# Altium PCB PCB1.PcbDoc
Units mm, origin at the board's own origin, x right, y up, seen from the top; angles counter-clockwise.
Board outline 120 x 120 mm, 2 copper layers (Top Layer, Bottom Layer); 55 components, 39 nets, 182 pads, 0 vias.
Unrouted connection lines stored in the file: 111.
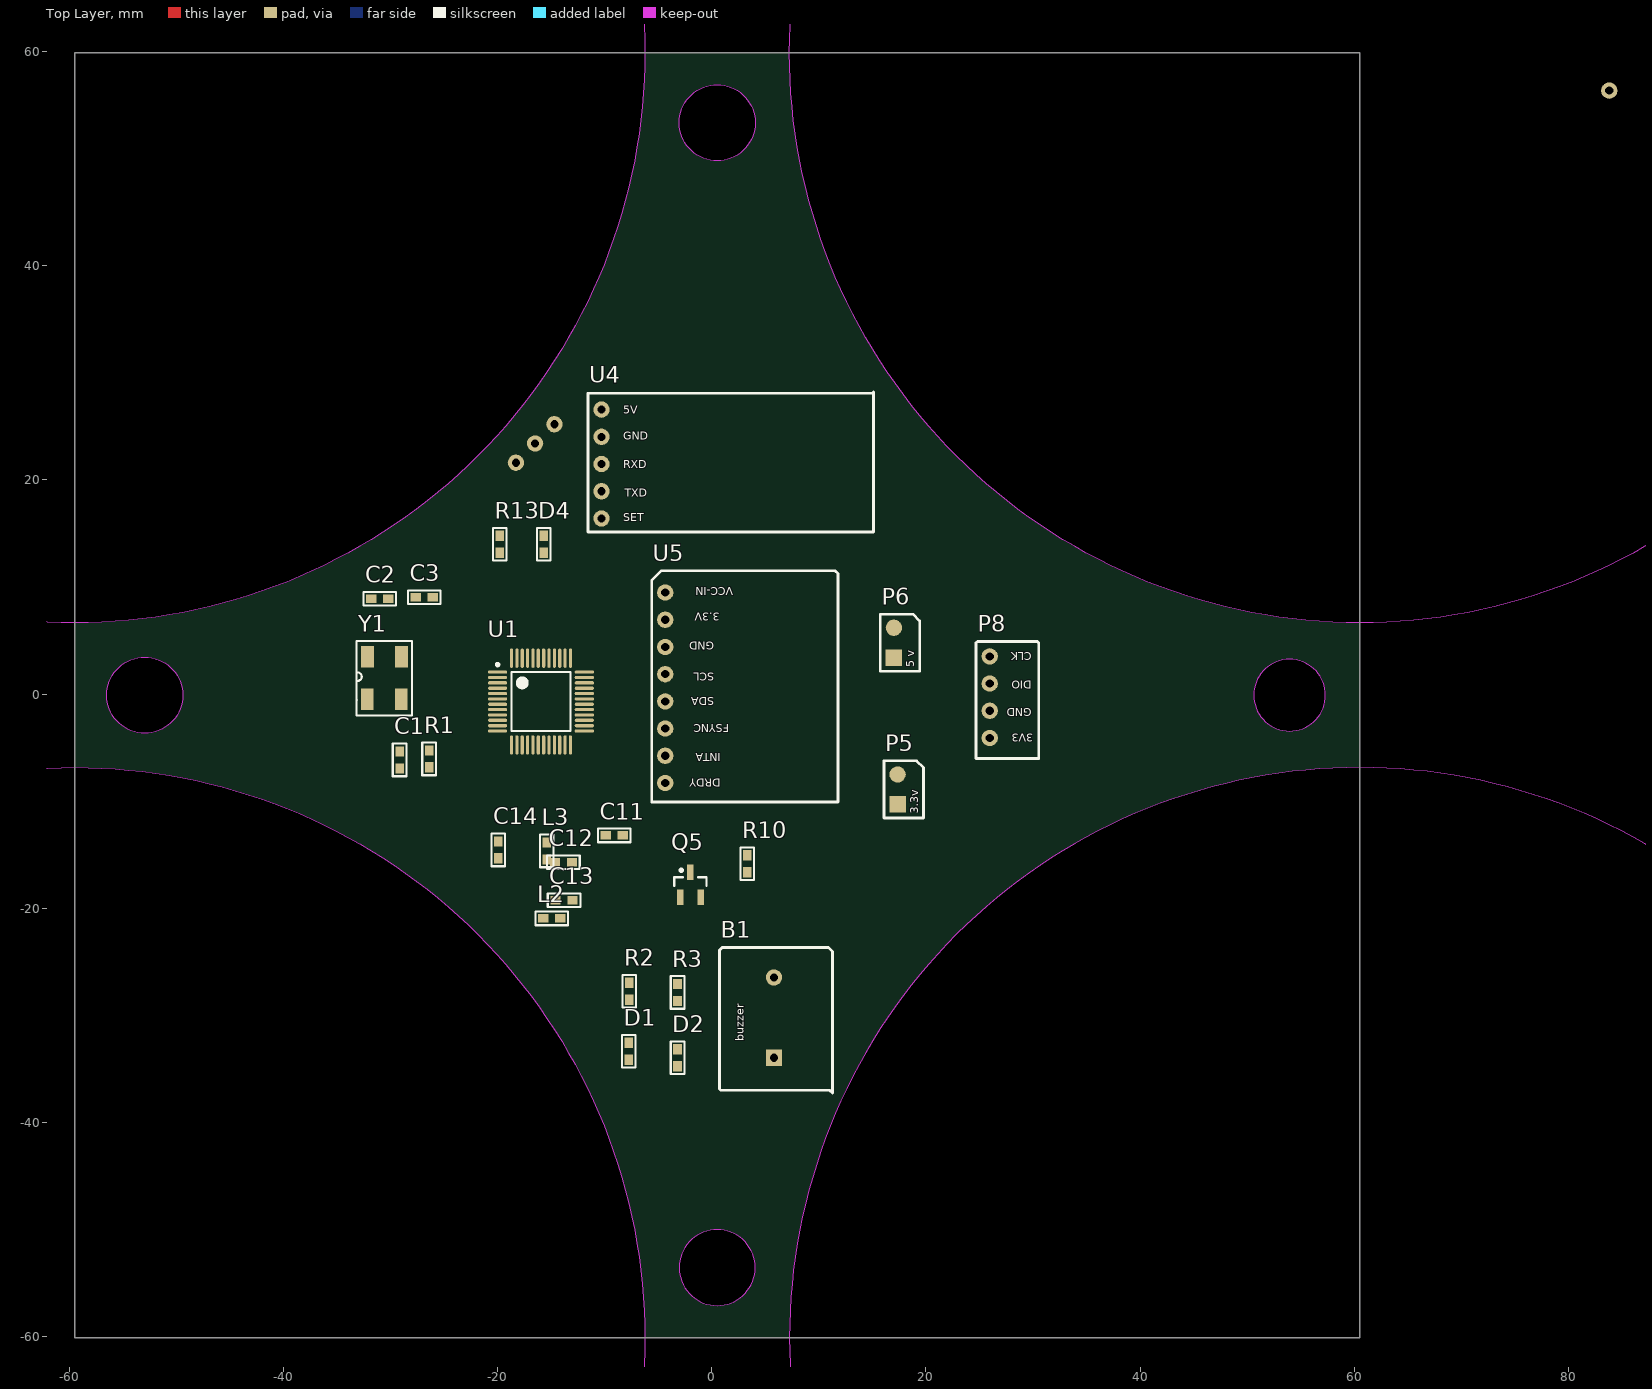
[diagram p0: Top Layer view]
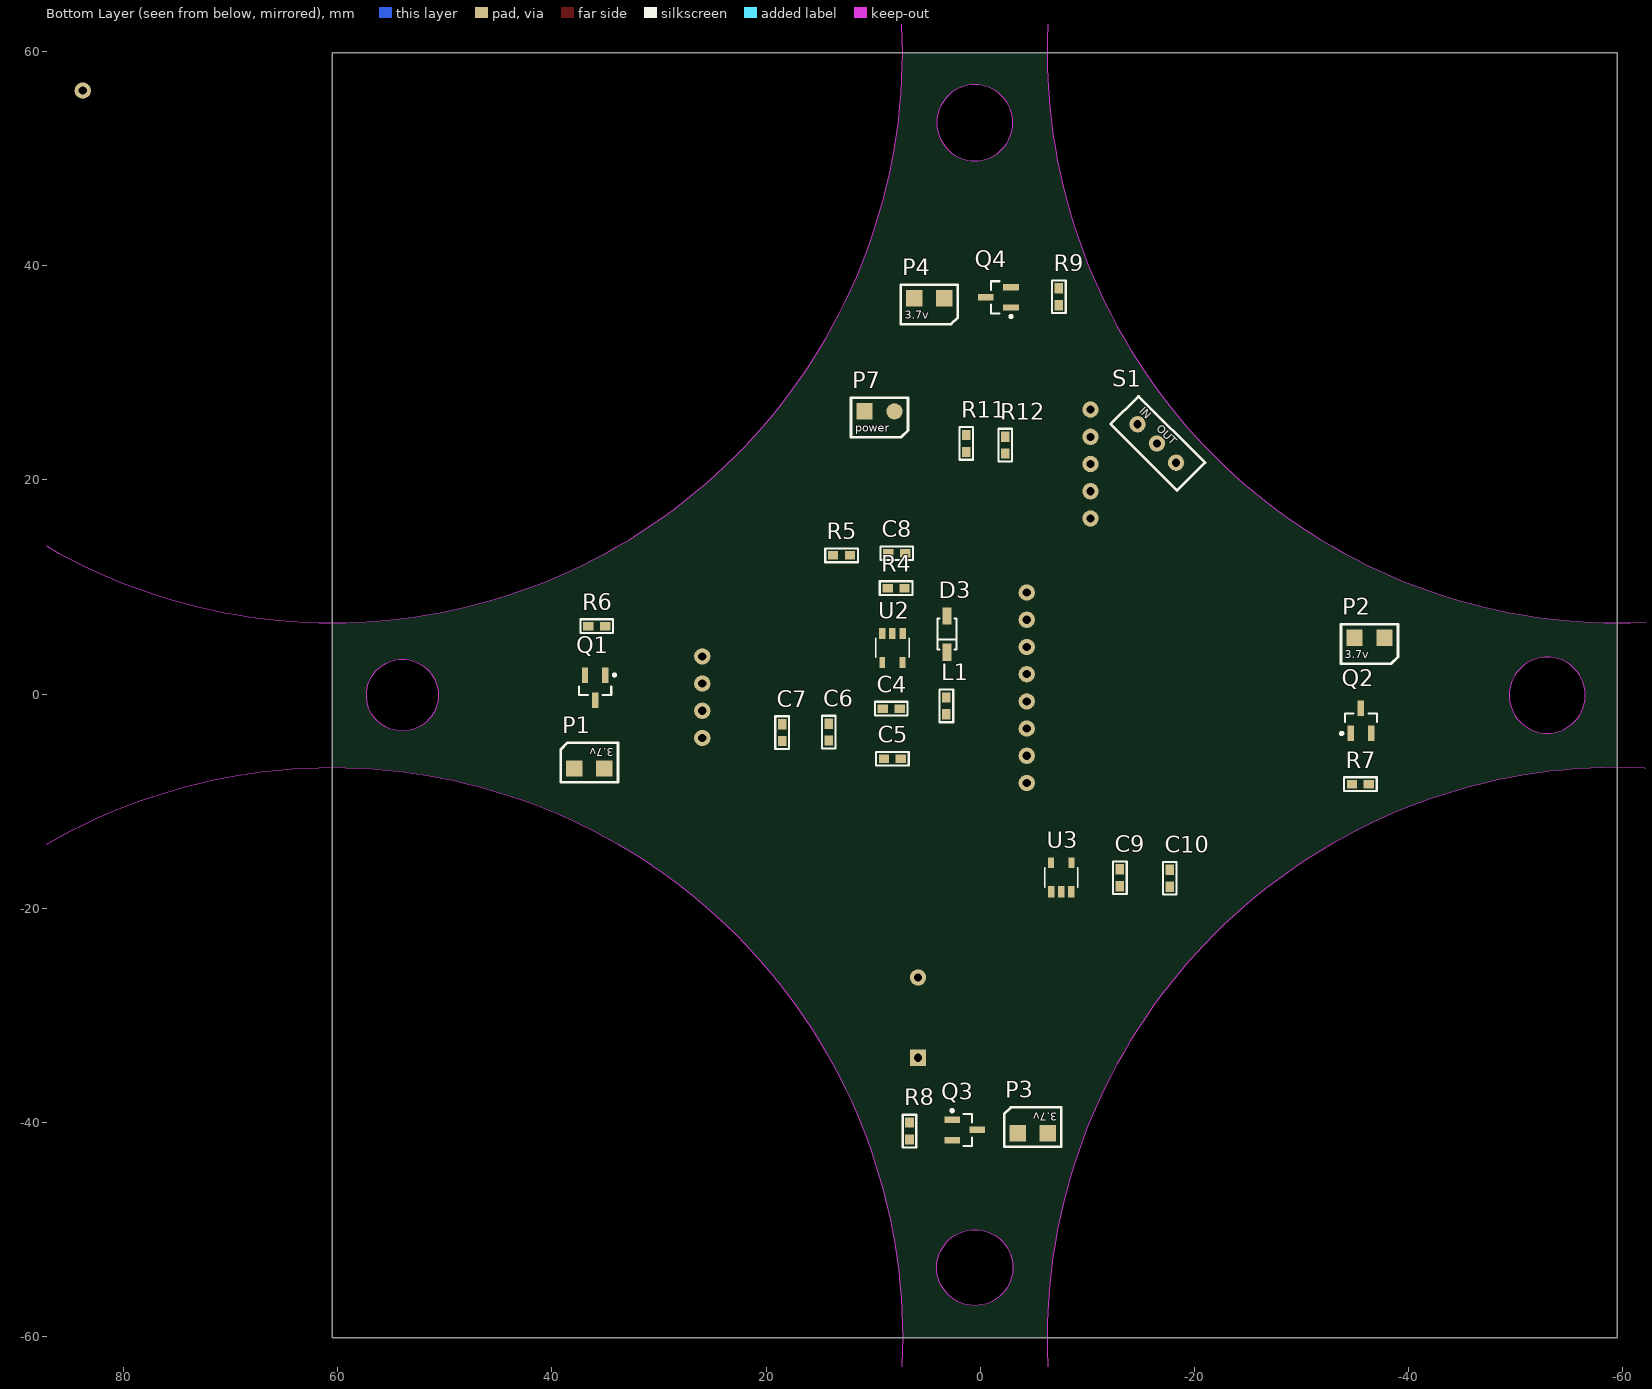
[diagram p1: Bottom Layer view, seen from below]

## Layer stack, top to bottom
Top Solder: solder mask 0.0102, Solder Resist, Dk 3.5
Top Layer: signal copper 0.0356
Dielectric 1: dielectric 0.32, FR-4, Dk 4.8
Bottom Layer: signal copper 0.0356
Bottom Solder: solder mask 0.0102, Solder Resist, Dk 3.5

## Board outline
-59.5,-60.1 60.5,-60.1 60.5,59.9 -59.5,59.9
cut-out: -59.5,6.65 cw(c-59.5,59.9) -112.75,59.9 cw(c-59.5,59.9) -59.5,113.15 cw(c-59.5,59.9) -6.25,59.9 cw(c-59.5,59.9)
cut-out: 60.5,6.65 cw(c60.5,59.9) 7.25,59.9 cw(c60.5,59.9) 60.5,113.15 cw(c60.5,59.9) 113.75,59.9 cw(c60.5,59.9)
cut-out: 7.25,-60.1 ccw(c60.5,-60.1) 60.5,-113.35 ccw(c60.5,-60.1) 113.75,-60.1 ccw(c60.5,-60.1) 60.5,-6.85 ccw(c60.5,-60.1)
cut-out: -59.5,-113.35 cw(c-59.5,-60.1) -112.75,-60.1 cw(c-59.5,-60.1) -59.5,-6.85 cw(c-59.5,-60.1) -6.25,-60.1 cw(c-59.5,-60.1)
cut-out: -52.95,-3.65 cw(c-52.95,-0.1) -56.5,-0.1 cw(c-52.95,-0.1) -52.95,3.45 cw(c-52.95,-0.1) -49.4,-0.1 cw(c-52.95,-0.1)
cut-out: -3.05,-53.55 ccw(c0.5,-53.55) 0.5,-57.1 ccw(c0.5,-53.55) 4.05,-53.55 ccw(c0.5,-53.55) 0.5,-50 ccw(c0.5,-53.55)
cut-out: 50.6,-0.1 ccw(c53.95,-0.1) 53.95,-3.45 ccw(c53.95,-0.1) 57.3,-0.1 ccw(c53.95,-0.1) 53.95,3.25 ccw(c53.95,-0.1)
cut-out: 0.5,49.8 cw(c0.5,53.35) -3.05,53.35 cw(c0.5,53.35) 0.5,56.9 cw(c0.5,53.35) 4.05,53.35 cw(c0.5,53.35)

## Design rules (kind name [scope] priority, off if disabled: settings)
Clearance [All] p1: gap=0.2
PolygonConnect [All] p1: connectstyle=Relief reliefconductorwidth=0.254 reliefentries=4 polygonreliefangle="90 Angle" airgapwidth=0.254
RoutingVias [All] p1: holewidth=0.6 width=1 viastyle="Through Hole" minholewidth=0.711 minwidth=1.27 maxholewidth=0.711 maxwidth=1.27
SolderMaskExpansion [All] p1: expansion=0.102
Width [All] p1: maxlimit=0.3 minlimit=0.3 preferedwidth=0.3
30 further rules are at their usual default settings.

## Components (designator, comment, footprint, x,y, rotation, side; value= is the part's Value field where it differs from the comment)
B1 "Buzzer" Buzzer 5.8,-33.95 r90 top
C1 "Cap" 0603-N-CAP -29.15,-6.15 r90 top
C2 "Cap" 0603-N-CAP -31,8.9 r180 top
C3 "Cap" 0603-N-CAP -26.85,9.05 r0 top
C4 "Cap" 0603-N-CAP 8.3,-1.35 r180 bottom
C5 "Cap" 0603-N-CAP 8.2,-6.05 r180 bottom
C6 "Cap" 0603-N-CAP 14.15,-3.55 r270 bottom
C7 "Cap" 0603-N-CAP 18.5,-3.6 r270 bottom
C8 "Cap" 0603-N-CAP 7.8,13.15 r180 bottom
C9 "Cap" 0603-N-CAP -13.05,-17.15 r90 bottom
C10 "Cap" 0603-N-CAP -17.7,-17.2 r90 bottom
C11 "Cap" 0603-N-CAP -9.1,-13.2 r0 top
C12 "Cap" 0603-N-CAP -13.85,-15.7 r0 top
C13 "Cap" 0603-N-CAP -13.8,-19.25 r0 top
C14 "Cap" 0603-N-CAP -19.95,-14.55 r90 top
D1 "D2" "0603-N - LED-RED" -7.75,-33.35 r270 top
D2 "D2" "0603-N - LED-RED" -3.2,-33.96 r90 top
D3 "MBR0520" 425 3.1,5.6 r90 bottom
D4 "D2" "0603-N - LED-RED" -15.7,14 r90 top
L1 "Inductor" "0603-N - res" 3.15,-1.1 r270 bottom
L2 "Inductor" "0603-N - res" -14.95,-20.95 r180 top
L3 "Inductor" "0603-N - res" -15.4,-14.65 r90 top
P1 "motor1" Motor 35.1,-6.95 r0 bottom
P2 "motor2" Motor -34.95,5.25 r180 bottom
P3 "motor3" Motor -6.3,-41 r0 bottom
P4 "motor4" Motor 6.15,36.95 r180 bottom
P5 "3.3V_GND" 3.3V_GND 17.35,-10.3 r90 top
P6 "5V_GND" 5V_GND 17,3.4 r90 top
P7 "Power_GND" Power_GND 10.8,26.4 r180 bottom
P8 "SW_download" SW_download 25.95,-4.1 r90 top
Q1 "SI2302" SOT-23_M 35.95,0.6 r270 bottom
Q2 "SI2302" SOT-23_M -35.55,-2.5 r90 bottom
Q3 "SI2302" SOT-23_M 1.45,-40.7 r180 bottom
Q4 "SI2302" SOT-23_M -1.7,37.05 r0 bottom
Q5 "NPN" SOT23_M -2,-17.8 r90 top
R1 "Res2" "0603-N - res" -26.4,-6.05 r90 top
R2 "Res1" "0603-N - res" -7.7,-27.75 r90 top
R3 "Res1" "0603-N - res" -3.2,-27.86 r90 top
R4 "Res1" "0603-N - res" 7.85,9.9 r180 bottom
R5 "Res1" "0603-N - res" 12.95,12.95 r180 bottom
R6 "Res1" "0603-N - res" 35.8,6.35 r180 bottom
R7 "Res1" "0603-N - res" -35.5,-8.4 r0 bottom
R8 "Res1" "0603-N - res" 6.6,-40.8 r90 bottom
R9 "Res1" "0603-N - res" -7.35,37.1 r270 bottom
R10 "Res1" "0603-N - res" 3.3,-15.85 r90 top
R11 "Res1" "0603-N - res" 1.3,23.4 r90 bottom
R12 "Res1" "0603-N - res" -2.35,23.25 r90 bottom
R13 "Res1" "0603-N - res" -19.8,14 r90 top
S1 "switch" SWITCH -14.7,25.2 r225 bottom
U1 "STM32F101C8T6" LQFP48_N -15.95,-0.7 r0 top
U2 "LM27313" SOT-23_5-001 7.25,5.65 r0 bottom
U3 "MIC5205" SOT-23_5-001 -6.62,-18.45 r180 bottom
U4 "433" 433 -10.3,16.4 r90 top
U5 "MPU6050_10" MPU6050_10 -4.35,-8.3 r90 top
Y1 "8M" 5032_ -32.15,-1 r90 top

## Footprints (in the part's own frame and the unit in brackets; to place one, negate y for a bottom-side part, rotate by r counter-clockwise, add the part's x,y. Pads: shape width x height; smd on the part's side, far side on the other; paste and mask are expansions set on the pad)
3.3V_GND [mil]
  rect 60x60 smd: 1(0,0)
  round 60 smd: 2(110,0)
  silkscreen extent -50,-95 160,50
5V_GND [mil]
  rect 60x60 smd: 1(0,0)
  round 60 smd: 2(110,0)
  silkscreen extent -50,-95 160,50
425 [mm] "SOD-123; 2 Leads; Body 2.7 x 1.6 mm, (LxW)"
  rect 1.6x0.85 smd: 1(-1.7,0) 2(1.7,0)
  silkscreen extent -1.45,-0.9 1.45,0.9
433 [mil]
  round 60 hole 30: 1(0,0) 2(100,0) 3(200,0) 4(300,0) 5(400,0)
  silkscreen extent -50,-1000 465,50
"0603-N - LED-RED" [mm]
  rect 0.96x0.8 smd: 1(-0.79,0) 2(0.79,0)
  silkscreen extent -1.52,-0.64 1.52,0.63, body extent -0.8,-0.4 0.8,0.4, height 0.6
"0603-N - res" [mm]
  rect 0.96x0.8 smd: 1(-0.79,0) 2(0.79,0)
  silkscreen extent -1.52,-0.64 1.52,0.64, body extent -0.8,-0.4 0.8,0.4, height 0.4
0603-N-CAP [mm]
  rect 0.96x0.8 smd: 1(-0.79,0) 2(0.79,0)
  silkscreen extent -1.52,-0.63 1.52,0.64, body extent -0.8,-0.4 0.8,0.4, height 0.3
5032_ [mm]
  rect 2x1.2 smd: 1(0.533,-3.15) 2(4.47,-3.175) 3(4.47,0) 4(0.533,0.025)
  silkscreen extent -1.02,-4.14 5.97,1.02, body extent -0.03,-3.15 5,0.05, height 0.8
Buzzer [mil]
  rect 60x60 hole 30: 1(0,0)
  round 60 hole 30: 2(295,0)
  silkscreen extent -130,-215 405,200
LQFP48_N [mm] "Thin QFP, 48-Leads, Body 7x7mm, Pitch 0.5mm, IPC Medium Density"
  oval 1.8x0.3 smd: 1(-4.05,2.75) 2(-4.05,2.25) 3(-4.05,1.75) 4(-4.05,1.25) 5(-4.05,0.75) 6(-4.05,0.25) 7(-4.05,-0.25) 8(-4.05,-0.75) 9(-4.05,-1.25) 10(-4.05,-1.75) 11(-4.05,-2.25) 12(-4.05,-2.75) 25(4.05,-2.75) 26(4.05,-2.25) 27(4.05,-1.75) 28(4.05,-1.25) 29(4.05,-0.75) 30(4.05,-0.25) 31(4.05,0.25) 32(4.05,0.75) 33(4.05,1.25) 34(4.05,1.75) 35(4.05,2.25) 36(4.05,2.75)
  oval 0.3x1.8 smd: 13(-2.75,-4.05) 14(-2.25,-4.05) 15(-1.75,-4.05) 16(-1.25,-4.05) 17(-0.75,-4.05) 18(-0.25,-4.05) 19(0.25,-4.05) 20(0.75,-4.05) 21(1.25,-4.05) 22(1.75,-4.05) 23(2.25,-4.05) 24(2.75,-4.05) 37(2.75,4.05) 38(2.25,4.05) 39(1.75,4.05) 40(1.25,4.05) 41(0.75,4.05) 42(0.25,4.05) 43(-0.25,4.05) 44(-0.75,4.05) 45(-1.25,4.05) 46(-1.75,4.05) 47(-2.25,4.05) 48(-2.75,4.05)
  silkscreen extent -4.17,-2.75 2.75,3.57, body extent -3.5,-3.5 3.5,3.5, height 1.6
Motor [mil]
  rect 60x60 smd: 1(0,0) 2(110,0)
  silkscreen extent -50,-95 160,50
MPU6050_10 [mil] "mpu6050_10轴传感器"
  round 60 hole 30: 0(0,0) 1(100,0) 2(200,0) 3(300,0) 4(400,0) 5(500,0) 6(600,0) 7(700,0)
  silkscreen extent -70,-635 780,50
Power_GND [mil]
  rect 60x60 smd: 1(0,0)
  round 60 smd: 2(110,0)
  silkscreen extent -50,-95 160,50
SOT23_M [mm] "SOT23, 3-Leads, Body 2.9x1.3mm, Pitch 0.95mm, Lead Span 2.3mm - Reverse Pinning, IPC Low Density"
  rect 1.45x0.6 smd: 1(1.175,0) 2(-1.175,-0.95) 3(-1.175,0.95)
  silkscreen extent -0.1,-1.5 1.47,1.5, body extent -0.7,-1.5 0.7,1.5, height 1.1
SOT-23_5-001 [mm]
  rect 0.6x1.05 smd: 1(0,0) 2(0.95,0) 3(1.9,0)
  rect 0.55x1 smd: 4(1.9,2.7) 5(0,2.7)
  silkscreen extent -0.61,0.42 2.49,2.22, body extent -0.49,0 2.41,2.8, height 1.09
SOT-23_M [mm] "SOT23, 3-Leads, Body 2.9x1.3mm, Pitch 0.95mm, Lead Span 2.3mm, IPC Low Density"
  rect 1.45x0.6 smd: 1(-1.175,0.95) 2(-1.175,-0.95) 3(1.175,0)
  silkscreen extent -1.3,-1.5 0.7,1.92, body extent -0.7,-1.5 0.7,1.5, height 1.11
SW_download [mil]
  round 60 hole 30: 1(0,0) 2(100,0) 3(200,0) 4(300,0)
  silkscreen extent -75,-180 355,50
SWITCH [mil]
  round 60 hole 30: 1(0,0) 2(100,0) 3(200,0)
  silkscreen extent -70,-70 275,75

## Part data
C1 C2 C3 C4 C5 C6 C7 C8 C9 C10 C11 C12 C13 C14: "Capacitor"
D1 D2 D4: library part LED3, "Typical BLUE SiC LED"
D3: library part Diode, "Default Diode"
P1 P2 P3 P4: library part motor, "电机连接口"
Q1 Q2 Q3 Q4: library part IRLML2402, "HEXFET Power MOSFET"
Q5: library part 2N3904, "NPN General Purpose Amplifier"
R1 R2 R3 R4 R5 R6 R7 R8 R9 R10 R11 R12 R13: "Resistor"
U1: "STM32 ARM-based 32-bit MCU with 64 Kbytes Flash, 48-pin LQFP, Industrial Temperature"
U2: "3.7V升压到5v"
U3: "5V降压到3.3V"
U4: "通讯模块"
U5: library part MPU6050, "MPU6050_10轴"
Y1: library part XTAL, "Crystal Oscillator"

## Free pads (board coordinates)
  round 1.524 hole 0.762: 0(83.8,56.35)

## Nets (pads, with @x,y where several pads share a name; then routed paths per layer and width w, separated by ;. In a path a pad name is that pad's centre, name@x,y a point inside that pad or via, vN(x,y) a via of type N, cw(c..) or ccw(c..) an arc to the next point about the centre after c; other vN are vias at no path point)
3.3V: C9.2 C10.2 C11.2 C12.2 C13.2 L3.1 P5.1 P8.1 R1.1 R2.2 R3.2 U3.5
3.7V: P7.1 R11.1 S1.1
3.7VOUT: C4.1 C5.1 L1.1 P1.1 P2.1 P3.1 P4.1 R13.2 S1.2 U2.4 U2.5
5V: B1.1 C6.2 C7.2 C8.2 D3.2 P6.1 R4.2 U3.1 U3.3 U4.5 U5.7
BUZZER: R10.2 U1.15
GND: C1.1 C2.1 C3.2 C4.2 C5.2 C6.1 C7.1 C9.1 C10.1 C11.1 C12.1 C13.1 D4.2 L2.1 P5.2 P6.2 P7.2 P8.2 Q1.2 Q2.2 Q3.2 Q4.2 Q5.1 R5.1 R6.1 R7.1 R8.1 R9.1 R12.2 U1.20 U1.23 U1.35 U1.44 U1.47 U2.2 U3.2 U4.4 U5.5
IIC2_SCL: U1.21 U5.4
IIC2_SDA: U1.22 U5.3
LED_GRE: D2.2 U1.33
LED_RED: D1.2 U1.32
NetB1_2: B1.2 Q5.3
NetC1_2: C1.2 R1.2 U1.7
NetC2_2: C2.2 U1.5 Y1.3
NetC3_1: C3.1 U1.6 Y1.1
NetC8_1: C8.1 R4.1 R5.2 U2.3
NetD1_1: D1.1 R2.1
NetD2_1: D2.1 R3.1
NetD3_1: D3.1 L1.2 U2.1
NetD4_1: D4.1 R13.1
NetP1_2: P1.2 Q1.3
NetP2_2: P2.2 Q2.3
NetP3_2: P3.2 Q3.3
NetP4_2: P4.2 Q4.3
NetQ5_2: Q5.2 R10.1
PWR: R11.2 R12.1 U1.11
RX2_433: U1.13
RX2_434: U4.2
SET_433: U1.14
SET_434: U4.1
SWCLK: P8.4 U1.37
SWDIO: P8.3 U1.34
T4PWM1: Q1.1 R6.2 U1.42
T4PWM2: Q2.1 R7.2 U1.43
T4PWM3: Q3.1 R8.2 U1.45
T4PWM4: Q4.1 R9.2 U1.46
TX2_433: U1.12
TX2_434: U4.3
VDDA: C14.2 L3.2 U1.9
VSSA: C14.1 L2.2 U1.8
pads on no net: S1.3 U1.1 U1.2 U1.3 U1.4 U1.10 U1.16 U1.17 U1.18 U1.19 U1.24 U1.25 U1.26 U1.27 U1.28 U1.29 U1.30 U1.31 U1.36 U1.38 U1.39 U1.40 U1.41 U1.48 U3.4 U5.0 U5.1 U5.2 U5.6 Y1.2 Y1.4

## Silkscreen, mask and mechanical layers (free items; w line width, h text height)
Bottom Overlay:
  region: 116.15,-18.05 116.15,22.25 95.9,22.25 95.9,-18.05

## Text inside footprints (layer, text, board x,y; h text height)
B1: Top Overlay "buzzer" at 3.006,-32.426 h0.76 r90
P1: Bottom Overlay "3.7v" at 34.211,-5.045 h0.76 r180
P2: Bottom Overlay "3.7v" at -34.061,3.345 h0.76
P3: Bottom Overlay "3.7v" at -7.189,-39.095 h0.76 r180
P4: Bottom Overlay "3.7v" at 7.039,35.045 h0.76
P5: Top Overlay "3.3v" at 19.255,-11.189 h0.76 r90
P6: Top Overlay "5 v" at 18.905,2.511 h0.76 r90
P7: Bottom Overlay "power" at 11.689,24.495 h0.76
P8: Top Overlay "CLK" at 29.887,3.901 h0.76 r180; Top Overlay "DIO" at 29.887,1.234 h0.76 r180; Top Overlay "GND" at 29.887,-1.306 h0.76 r180; Top Overlay "3V3" at 30.014,-3.719 h0.76 r180
S1: Bottom Overlay "IN" at -14.79,26.367 h0.76 r45; Bottom Overlay "OUT" at -16.406,24.751 h0.76 r45
U4: Top Overlay "5V" at -8.268,26.179 h0.76; Top Overlay "GND" at -8.268,23.766 h0.76; Top Overlay "RXD" at -8.268,21.099 h0.76; Top Overlay "TXD" at -8.141,18.432 h0.76; Top Overlay "SET" at -8.268,16.146 h0.76
U5: Top Overlay "DRDY" at 0.857,-7.919 h0.76 r180; Top Overlay "INTA" at 0.857,-5.506 h0.76 r180; Top Overlay "FSYNC" at 1.619,-2.839 h0.76 r180; Top Overlay "SDA" at 0.222,-0.299 h0.76 r180; Top Overlay "SCL" at 0.222,1.987 h0.76 r180; Top Overlay "GND" at 0.222,4.908 h0.76 r180; Top Overlay "3.3V" at 0.73,7.575 h0.76 r180; Top Overlay "VCC-IN" at 2,9.988 h0.76 r180